# Altium PCB MULTITESTCARD V1I1.PcbDoc (part 1 of 2)
Units mm, origin at the board's own origin, x right, y up, seen from the top; angles counter-clockwise.
Board outline 57.4 x 56.52 mm, 4 copper layers (L1, L2 (GND), L3, L4), stack 0.778 mm thick; 59 components, 82 nets, 287 pads, 101 vias.
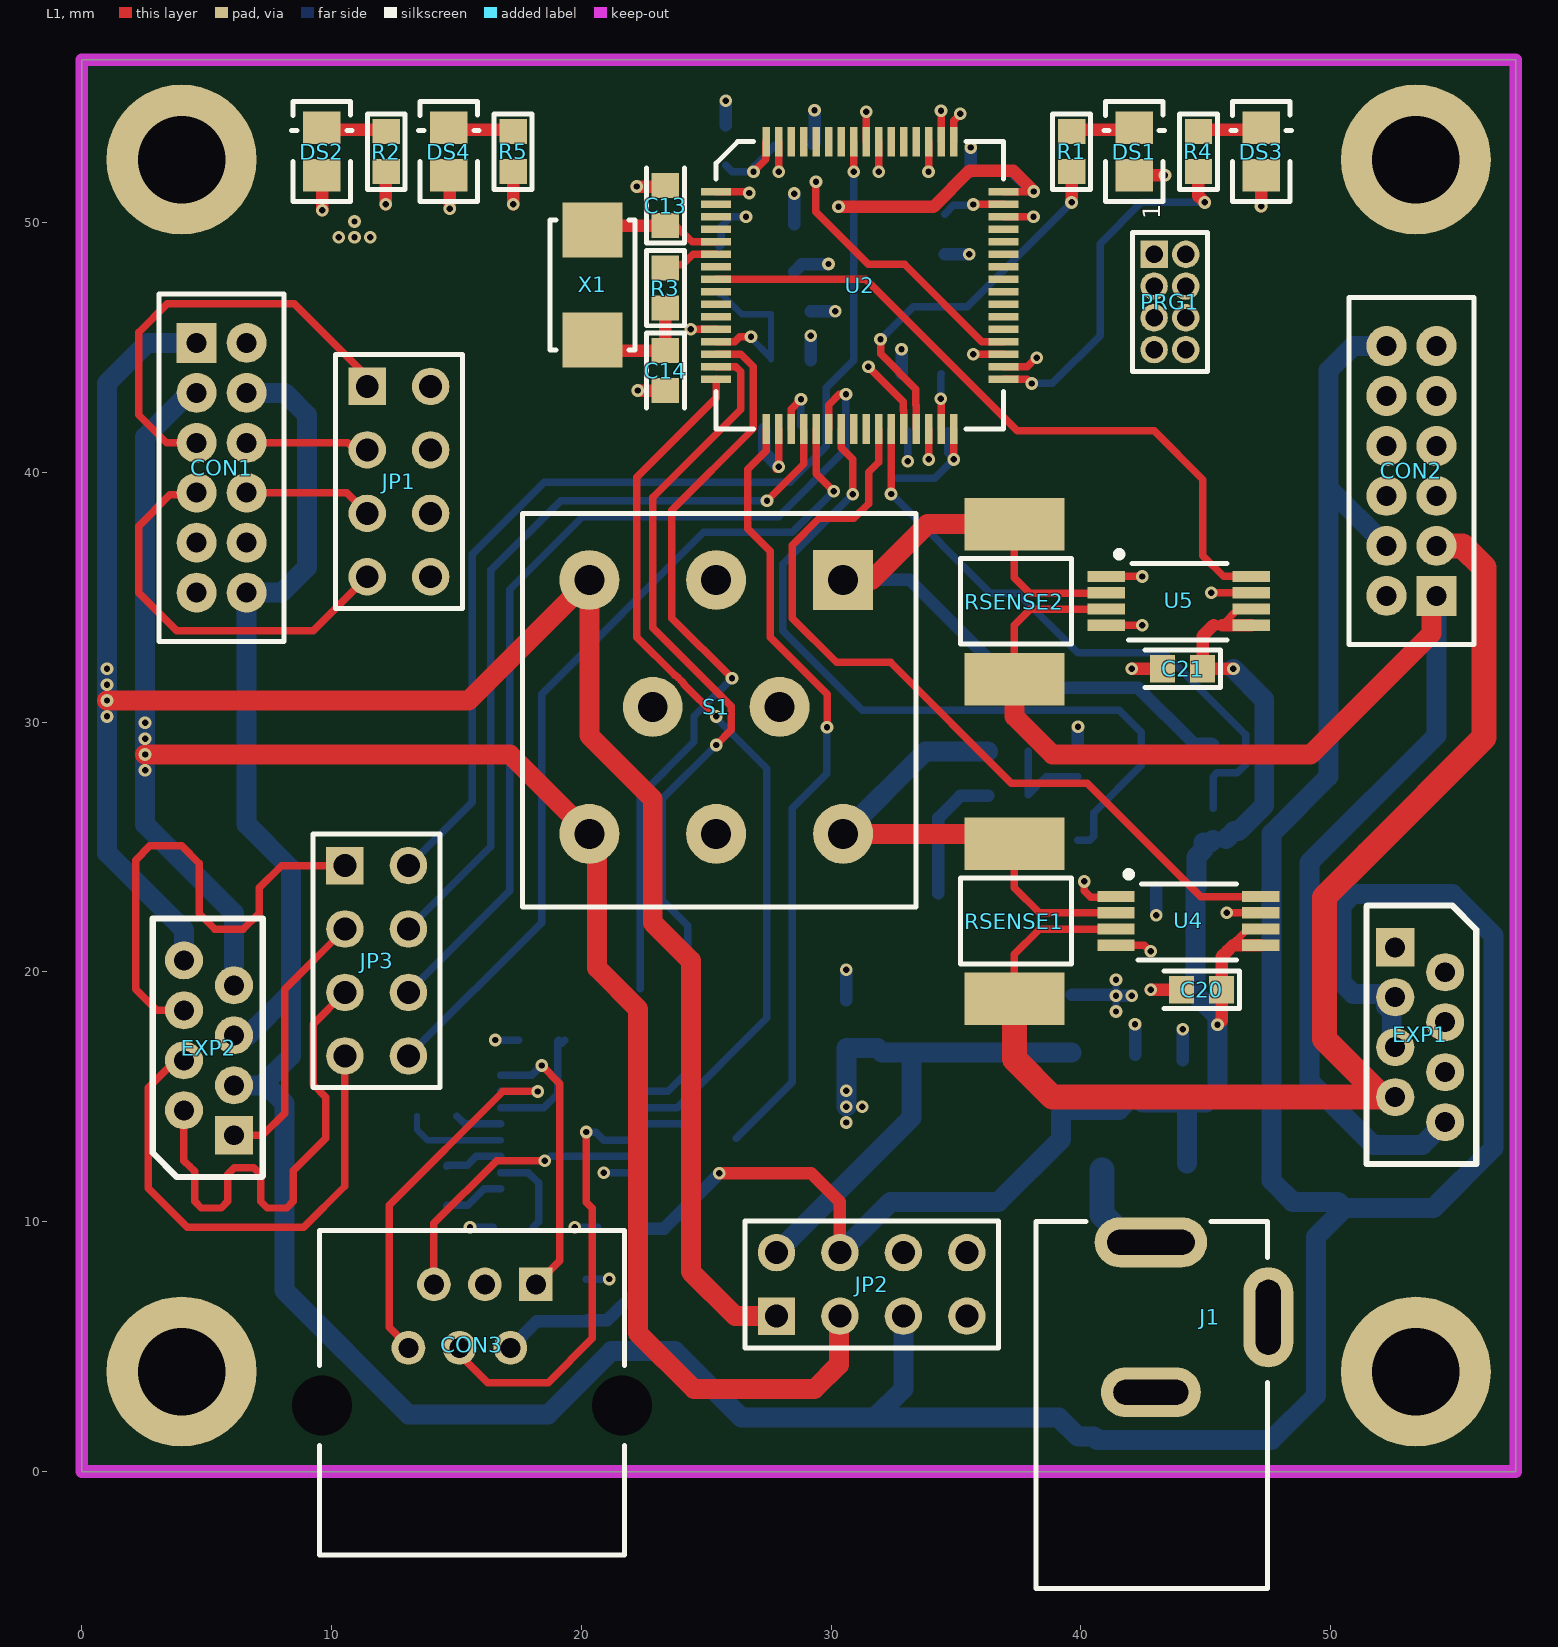
[diagram p0: L1 view]
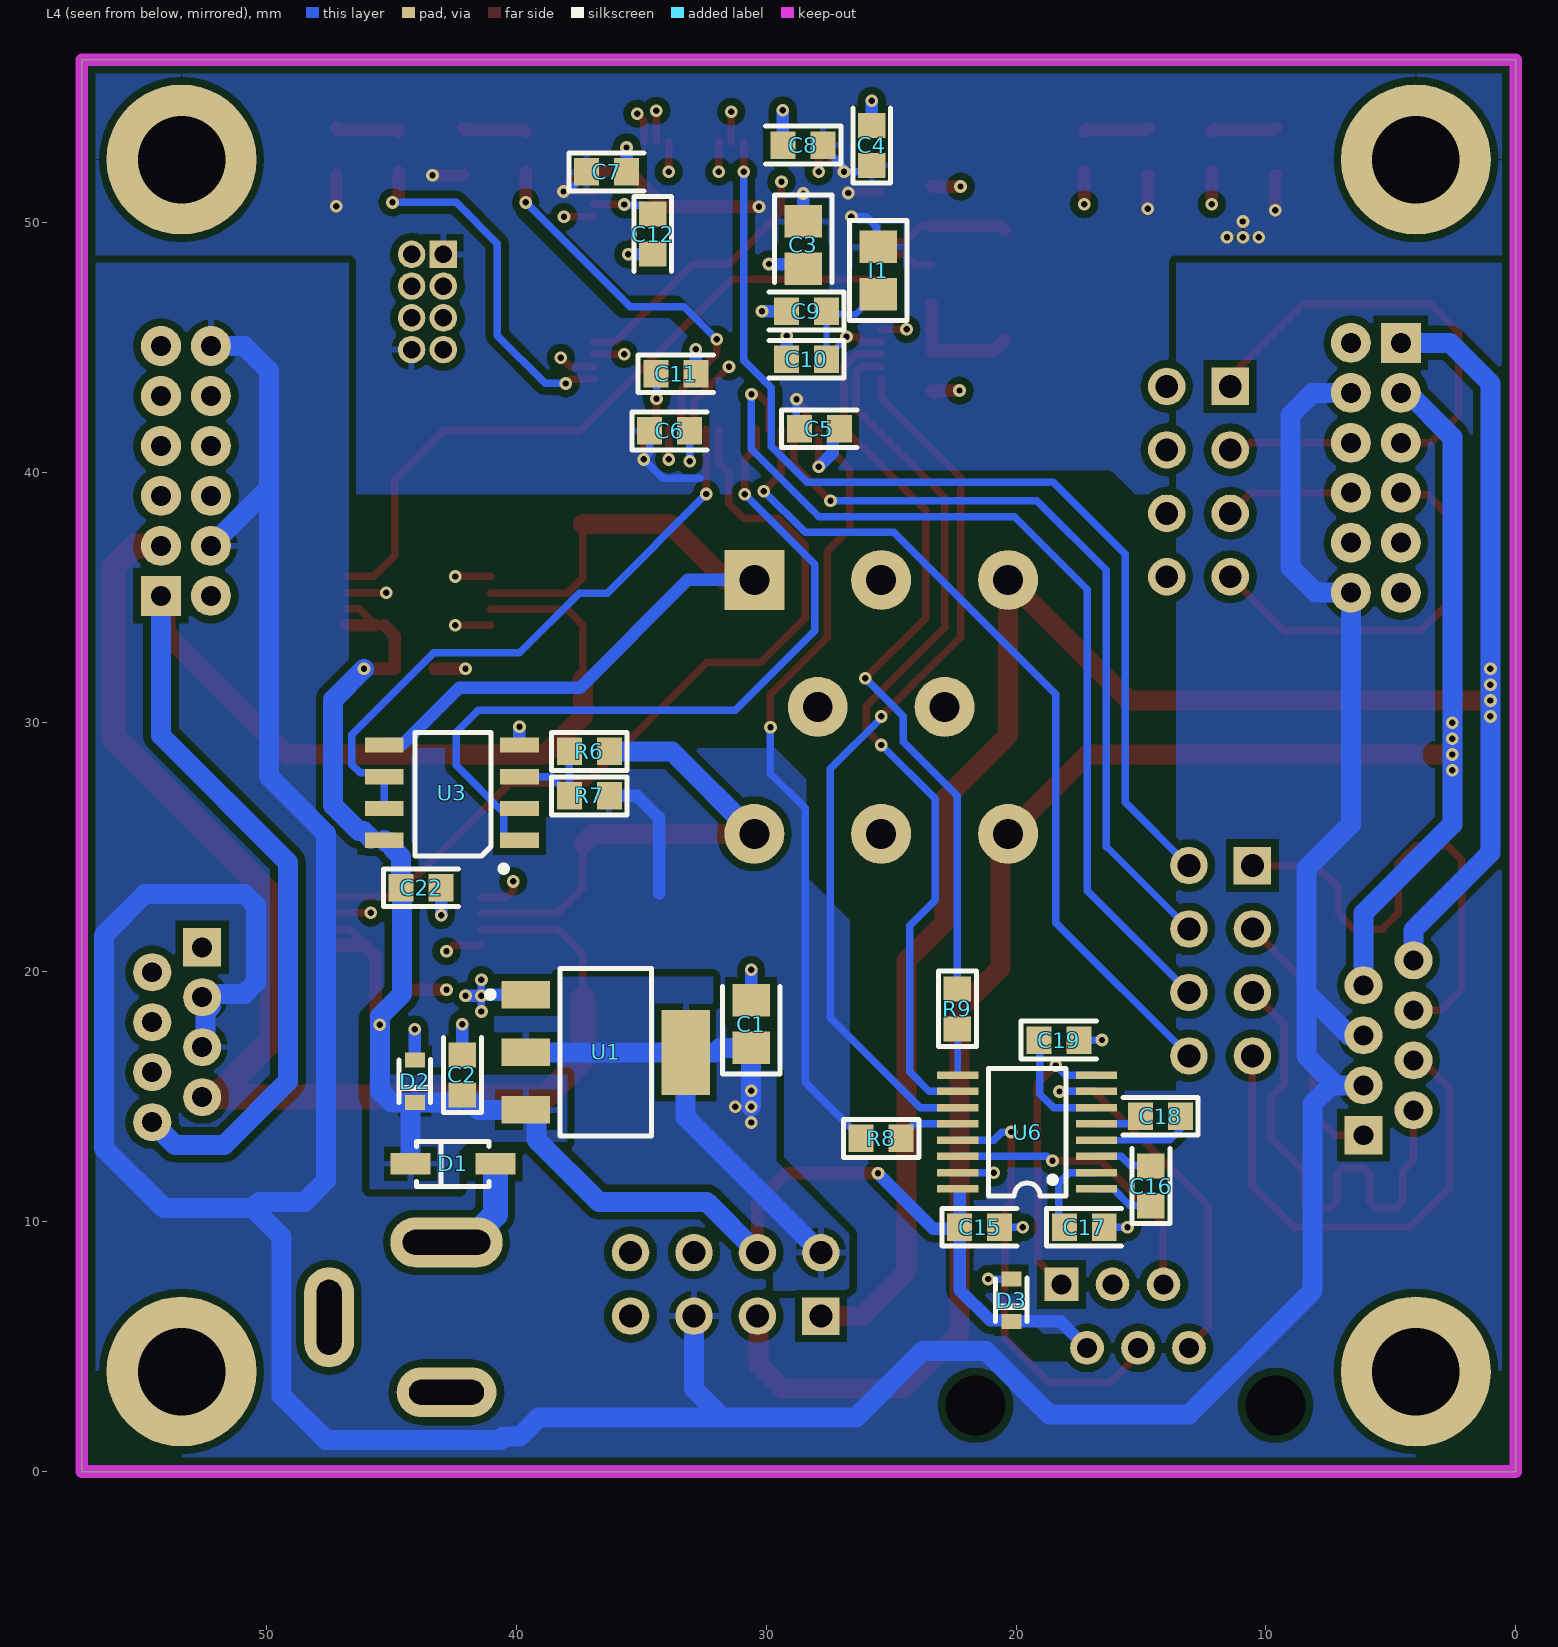
[diagram p1: L4 view, seen from below]
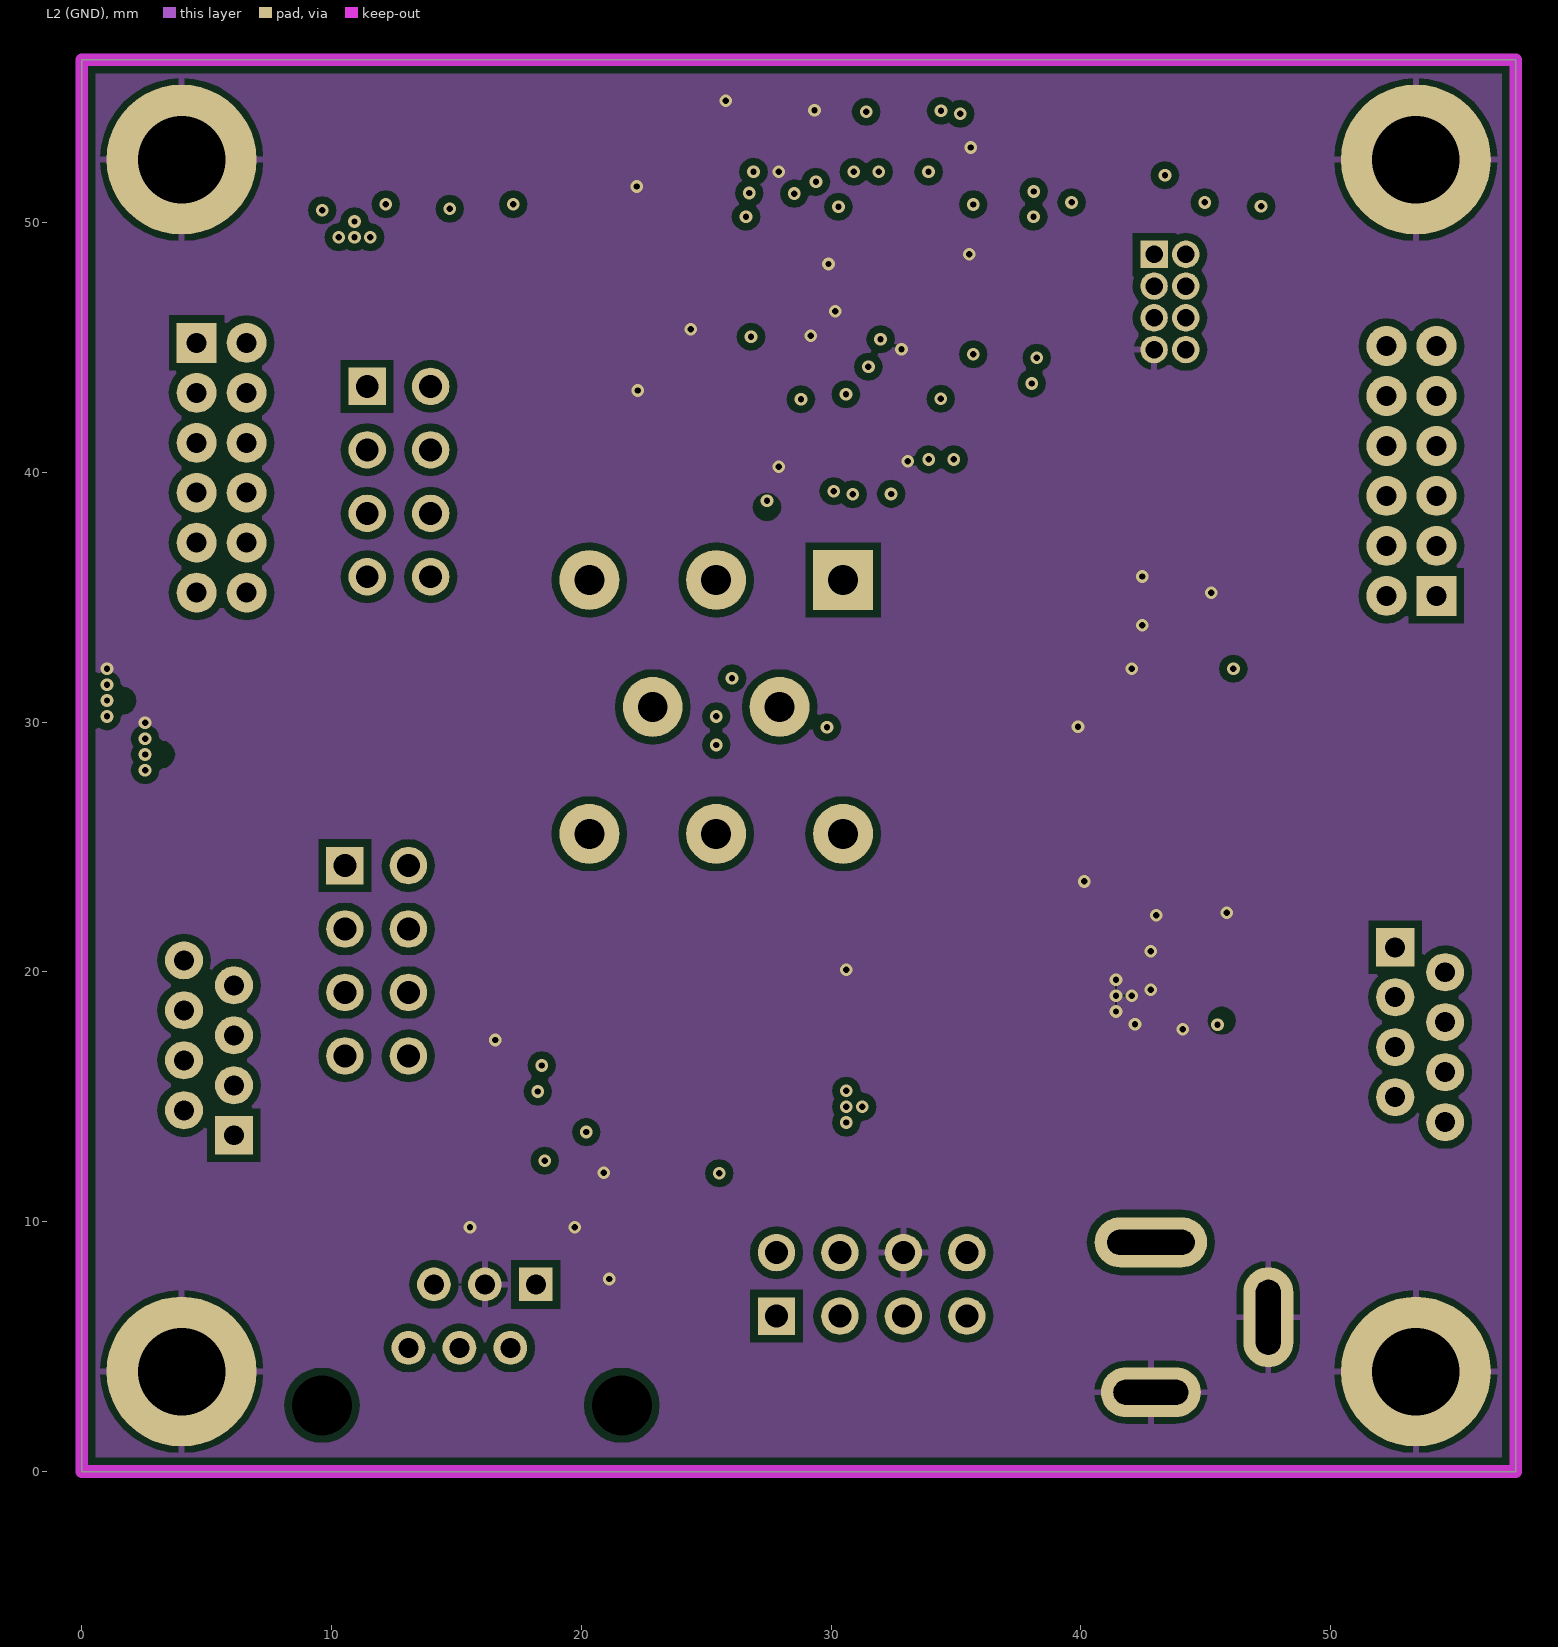
[diagram p2: L2 (GND)]
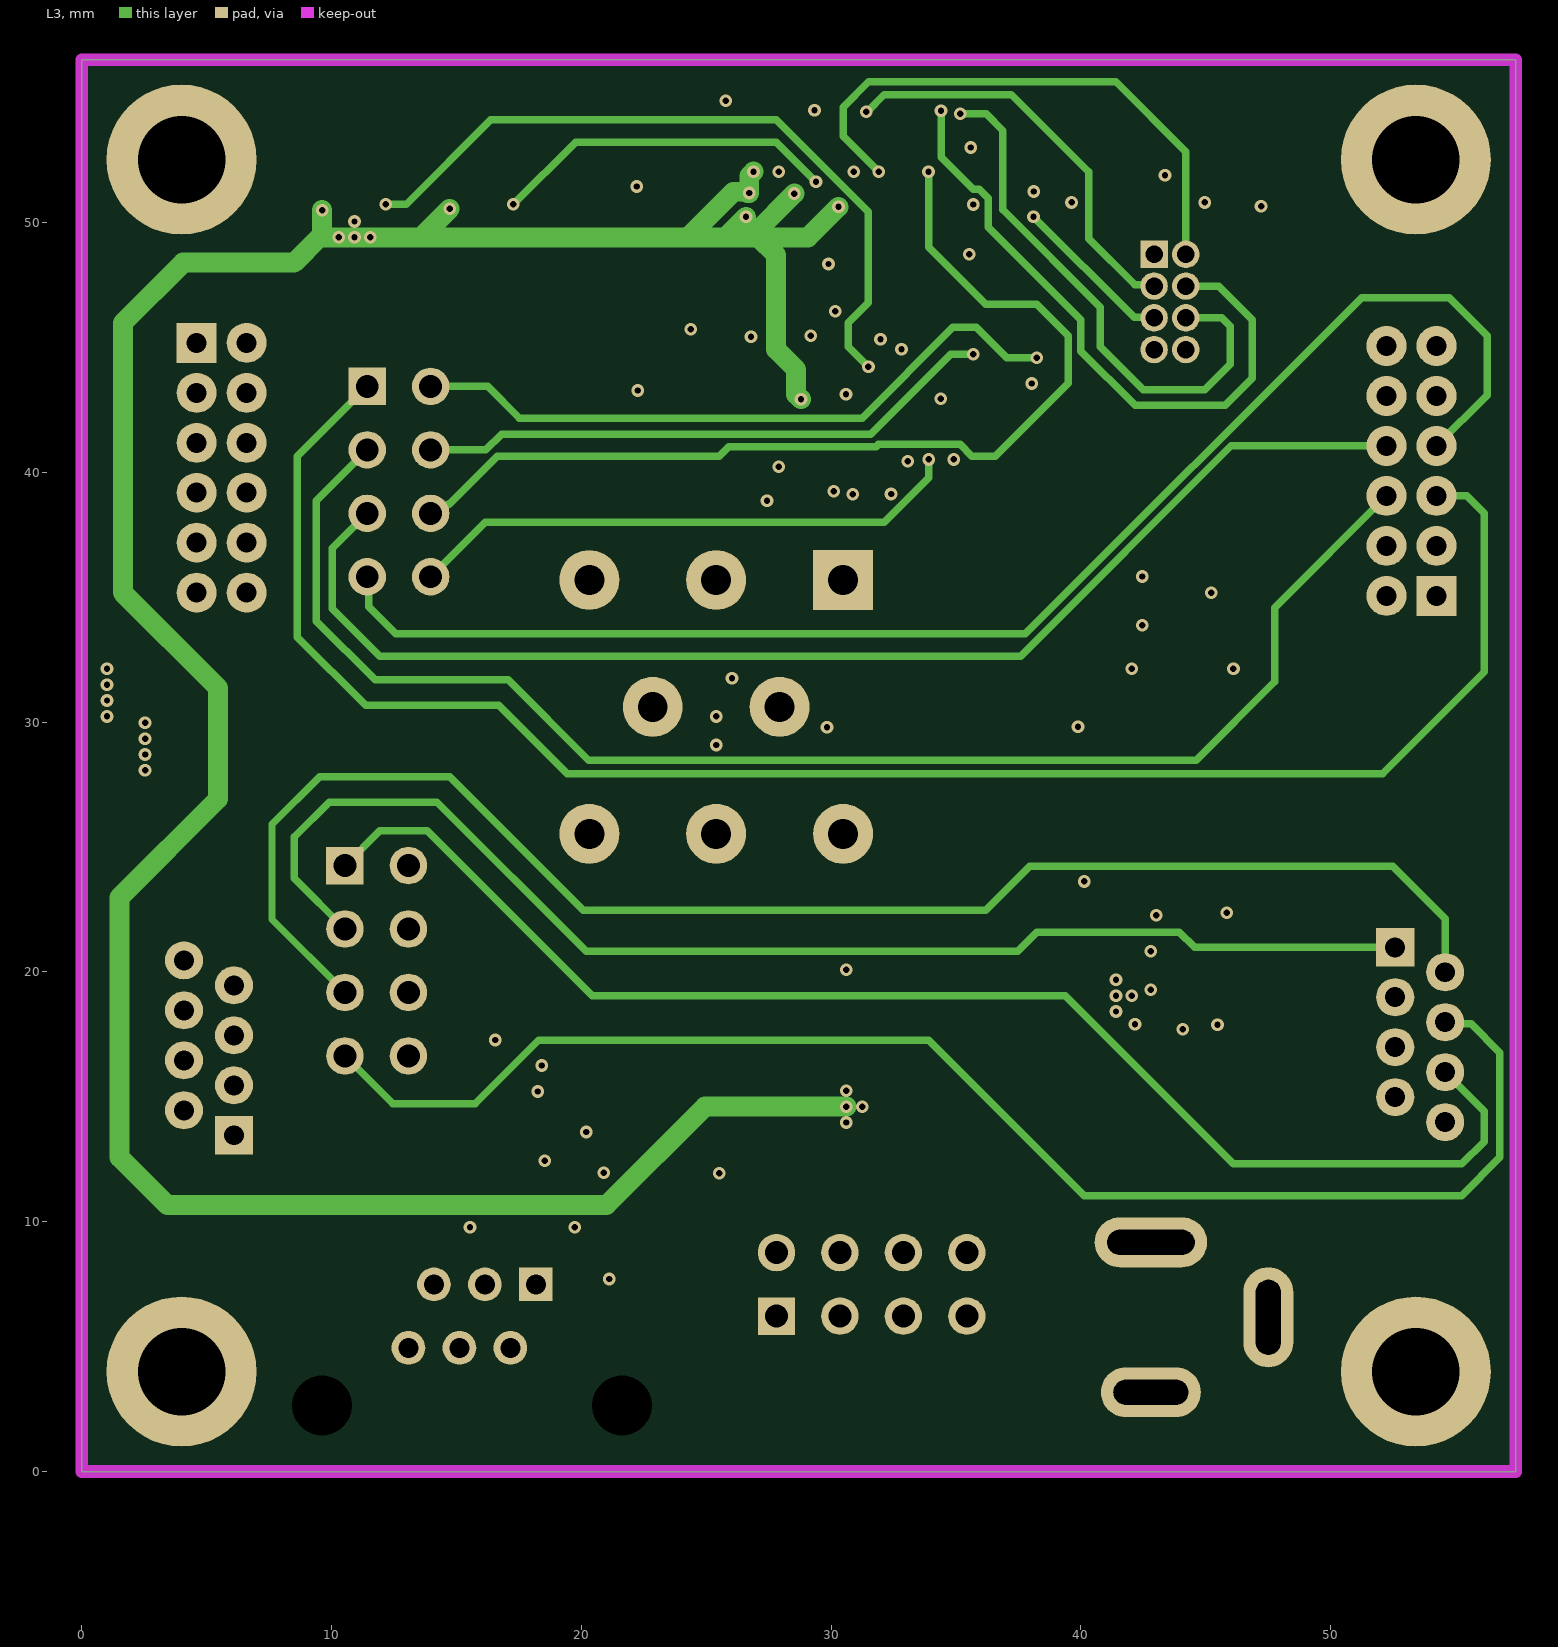
[diagram p3: L3]

## Layer stack, top to bottom
Top Solder: solder mask 0.0102, Solder Resist, Dk 3.5
L1: signal copper 0.0356
Dielectric1: core 0.254, FR-4, Dk 4.2
L2 (GND): signal copper 0.036
Dielectric 3: prepreg 0.127, Dk 4.2
L3: signal copper 0.036
Dielectric 2: core 0.254, Dk 4.2
L4: signal copper 0.0356
Bottom Solder: solder mask 0.0102, Solder Resist, Dk 3.5

## Board outline
0,0 57.404,0 57.404,56.515 0,56.515

## Design rules (kind name [scope] priority, off if disabled: settings)
Clearance Clearance_Polygons [InPolygon] p1: gap=0.3 ignorepadtopadclearanceinfootprint=FALSE
Clearance Clearance_MCU [HasFootprint('64-LQFP') or HasFootprint('8-TSSOP') vs OnLayer('Top Layer')] p2: gap=0.2 ignorepadtopadclearanceinfootprint=FALSE
Clearance Clearance_PRG1 [InComponent('PRG1')] p3: gap=0.17 ignorepadtopadclearanceinfootprint=FALSE
Clearance [All] p4: gap=0.2 ignorepadtopadclearanceinfootprint=FALSE
HoleSize HoleSize_MH [IsDesignator=('MH')] p1: absolutevalues=TRUE maxlimit=4 minlimit=0.025 maxpercent=80.000 minpercent=20.000
HoleSize [All] p2: absolutevalues=TRUE maxlimit=4 minlimit=0.025 maxpercent=80.000 minpercent=20.000
MatchedLengths MatchedLengths_SPI_TEST [All] p1: tolerance=0.254 checknetsindiffpair=FALSE checkdiffpairvsdiffpair=TRUE checkxsignals=TRUE checkothers=TRUE
MinimumSolderMaskSliver [All] p1: minsoldermaskwidth=0.05
PolygonConnect [All] p1: thpad.connectstyle=Relief thpad.reliefconductorwidth=0.254 thpad.reliefentries=4 thpad.polygonreliefangle="90 Angle" thpad.airgapwidth=0.254 smdpad.connectstyle=Relief smdpad.reliefconductorwidth=0.254 smdpad.reliefentries=4 smdpad.polygonreliefangle="90 Angle" smdpad.airgapwidth=0.254 via.connectstyle=Relief via.reliefconductorwidth=0.254 via.reliefentries=4 via.polygonreliefangle="90 Angle" via.airgapwidth=0
RoutingVias [All] p1: holewidth=0.254 width=0.508 viastyle="Through Hole" minholewidth=0.1 minwidth=0.4 maxholewidth=4 maxwidth=1.27
SilkToSolderMaskClearance SilkscreenOverComponentPads [IsPad] p1: minsilkscreentomaskgap=0.1 clearancetoexposedcopper=TRUE
SolderMaskExpansion [All] p1: expansion=0.102 istentingtop=FALSE
Width Width_PWR_TEST [InNetClass('PWR_TEST')] p1: maxlimit=1 minlimit=0.254 preferedwidth=0.8 minimp=50.000000 maximp=50.000000 favimp=50.000000
Width Width_Main_PWR [InNet('VGND','+3V3','+5V0','+5V')] p2: maxlimit=1 minlimit=0.254 preferedwidth=0.8 minimp=50.000000 maximp=50.000000 favimp=50.000000
Width [All] p3: maxlimit=0.5 minlimit=0.254 preferedwidth=0.3 minimp=50.000000 maximp=50.000000 favimp=50.000000
27 further rules are at their usual default settings.

## Classes and differential pairs
net class USART2_CON: CTS_MCU_RTS_PC_RS232 RTS_MCU_CTS_PC_RS232 RX_MCU_TX_PC_RS232 TX_MCU_RX_PC_RS232
net class USB: USB_DM USB_DP USB_ID USB_VBUS
net class USART3: USART3_CTS USART3_RTS USART3_RX USART3_TX
net class USART2: USART2_CTS USART2_RTS USART2_RX USART2_TX
net class UART_TEST: CTS_PORT RTS_PORT RX_PORT TX_PORT
net class SPI_TEST: SPI_CS SPI_MISO SPI_MOSI SPI_SCK
net class SPI1: SPI1_MISO SPI1_MOSI SPI1_NNS SPI1_SCK
net class LCD: LCD_D0 LCD_D1 LCD_D2 LCD_D3 LCD_D4 LCD_D5 LCD_D6 LCD_D7 LCD_E LCD_RS LCD_RW
net class JTAG: JTCK/SWCLK JTDI JTDO/TRACESWO JTMS/SWDIO NJTRST
net class PWR_TEST: +3V3IN +3V3OUT +3V3TEST +5VIN +5VOUT +5VTEST
component class Designator: C15 C16 C17 C18 C19 CON3 D3 D? R8 R9 U6 USB?
component class Designator: C20 C21 C22 CON1 CON2 CON? EXP1 EXP2 EXP? JP1 JP2 JP3 JP? R6 R7 R19 R? RSENSE1 RSENSE2 RSENSE? S1 S? U3 U4 U5 U?
component class Designator: * C1 C2 C3 C4 C5 C6 C7 C8 C9 C10 C11 C12 C13 C14 C? D1 D2 DS1 DS2 DS3 DS4 DS? I1 I? J1 PRG1 PRG? R1 R2 R3 R4 R5 U1 U2 X1 X?

## Components (designator, comment, footprint, x,y, rotation, side; value= is the part's Value field where it differs from the comment)
C1 "10uF" CC2012-0805 30.607,17.907 r90 bottom
C2 "0.1uF" CC-0603 42.164,15.875 r90 bottom
C3 "10uF" CC2012-0805 28.524,49.098 r270 bottom
C4 "0.1uF" CC-0603 25.781,53.086 r90 bottom
C5 "0.1uF" CC-0603 27.876,41.741 r180 bottom
C6 "0.1uF" CC-0603 33.871,41.656 r180 bottom
C7 "0.1uF" CC-0603 36.392,52.021 r180 bottom
C8 "0.1uF" CC-0603 28.526,53.095 r0 bottom
C9 "0.1uF" CC-0603 28.392,46.448 r0 bottom
C10 "1uF" CC-0603 28.392,44.524 r0 bottom
C11 "2.2uF" CC-0603 33.617,43.942 r180 bottom
C12 "2.2uF" CC-0603 34.544,49.53 r270 bottom
C13 "20pF" CC-0603 23.368,50.673 r90 top
C14 "20pF" CC-0603 23.368,44.069 r270 top
C15 "0.1uF" CC-0603 21.463,9.779 r180 bottom
C16 "0.1uF" CC-0603 14.605,11.43 r90 bottom
C17 "0.47uF" CC-0603 17.272,9.779 r180 bottom
C18 "0.47uF" CC-0603 14.224,14.224 r0 bottom
C19 "0.47uF" CC-0603 18.288,17.272 r180 bottom
C20 "0.1uF" CC-0603 44.831,19.285 r180 top
C21 "0.1uF" CC-0603 44.069,32.131 r180 top
C22 "0.1uF" CC-0603 43.815,23.368 r180 bottom
CON1 "CON PRINTER" "HEADER 2X6 B12B PHDS" 4.604,45.179 r0 top
CON2 "CON PRINTER" "HEADER 2X6 B12B PHDS" 54.229,35.052 r180 top
CON3 "RJ11" JACK1.02-2H6C 15.621,-3.347 r0 top locked
D1 "1N4148W-TP" SOD123 42.545,12.319 r0 bottom
D2 "Diode" SOD-523 44.069,15.621 r270 bottom
D3 "Diode" SOD-523 20.193,6.858 r270 bottom
DS1 "LED GREEN" LED-SMD-0805 42.164,52.832 r270 top
DS2 "LED GREEN" LED-SMD-0805 9.652,52.832 r270 top
DS3 "LED GREEN" LED-SMD-0805 47.244,52.832 r270 top
DS4 "LED GREEN" LED-SMD-0805 14.732,52.832 r270 top
EXP1 "SPI EXPANSION PORT" "CONN FPC/FFC 8POS" 53.403,17.961 r90 top
EXP2 "SPI EXPANSION PORT" "CONN FPC/FFC 8POS" 5.271,16.487 r270 top
I1 "120Ohm@100MHz 200mA" L-0805 25.502,48.067 r270 bottom
J1 "PWR2.5_AC" KLD-0202-AC 47.474,-4.675 r90 top
JP1 "JUMPER" HDR4X2 11.43,43.434 r0 top
JP2 "JUMPER" HDR4X2 27.813,6.223 r90 top
JP3 "JUMPER" HDR4X2 10.541,24.257 r0 top locked
PRG1 "JTAG" 20021311-00008T4LF 43.561,46.815 r90 top
R1 "1K" R-0603 39.624,52.832 r270 top
R2 "1K" R-0603 12.192,52.832 r270 top
R3 "390 Ohm" R-0603 23.368,47.371 r90 top
R4 "1K" R-0603 44.704,52.832 r270 top
R5 "1K" R-0603 17.272,52.832 r270 top
R6 "1K" R-0603 37.084,28.824 r0 bottom
R7 "1.2K" R-0603 37.084,27.046 r0 bottom
R8 "1K" R-0603 25.4,13.335 r180 bottom
R9 "1K" R-0603 22.352,18.52 r270 bottom
RSENSE1 "15 mOhm Shunt R" R-2512 37.338,18.923 r90 top
RSENSE2 "15 mOhm Shunt R" R-2512 37.338,31.72 r90 top
S1 "SWITCH PUSHBUTTON" UB26SKW03N 20.32,25.527 r90 top locked
U1 "LM1117" SOT223 39.643,19.07 r270 bottom
U2 "STM32F205RCT6" 64-LQFP 25.4,51.228 r270 top locked
U3 "LM2904DR" 8-SOIC 39.878,25.273 r0 bottom
U4 "IC AMP CURRENT" 8-TSSOP 41.402,23.017 r0 top
U5 "IC AMP CURRENT" 8-TSSOP 41.021,35.829 r0 top
U6 "ST3232EBTR" TSSOP-16 19.558,13.589 r90 bottom locked
X1 "25MHz" "ABM3 CRYSTAL" 20.447,47.498 r90 top

## Footprints (in the part's own frame and the unit in brackets; to place one, negate y for a bottom-side part, rotate by r counter-clockwise, add the part's x,y. Pads: shape width x height; smd on the part's side, far side on the other; paste and mask are expansions set on the pad)
8-SOIC [mil] "LM2904DR"
  rect 61x24 smd mask+1.97: 1(0,0) 2(0,-50) 3(0,-100) 4(0,-150) 5(213,-150) 6(213,-100) 7(213,-50) 8(213,0)
  silkscreen extent 20,-170 165,50, body extent -17,-174 227,24, height 66
8-TSSOP [mm] "INA240A1PWR"
  rect 1.5x0.45 smd mask+0.05: 1(0,0) 2(0,-0.65) 3(0,-1.3) 4(0,-1.95) 5(5.8,-1.95) 6(5.8,-1.3) 7(5.8,-0.65) 8(5.8,0)
  silkscreen extent 0.38,-2.54 4.83,1.01, body extent -0.57,-2.51 6.22,0.89, height 1.12
64-LQFP [mm] "64-LQFP"
  rect 0.3x1.2 smd mask+0.05: 1(0,0) 2(0.5,0) 3(1,0) 4(1.5,0) 5(2,0) 6(2.5,0) 7(3,0) 8(3.5,0) 9(4,0) 10(4.5,0) 11(5,0) 12(5.5,0) 13(6,0) 14(6.5,0) 15(7,0) 16(7.5,0) 33(7.5,11.5) 34(7,11.5) 35(6.5,11.5) 36(6,11.5) 37(5.5,11.5) 38(5,11.5) 39(4.5,11.5) 40(4,11.5) 41(3.5,11.5) 42(3,11.5) 43(2.5,11.5) 44(2,11.5) 45(1.5,11.5) 46(1,11.5) 47(0.5,11.5) 48(0,11.5)
  rect 1.2x0.3 smd mask+0.05: 17(9.5,2) 18(9.5,2.5) 19(9.5,3) 20(9.5,3.5) 21(9.5,4) 22(9.5,4.5) 23(9.5,5) 24(9.5,5.5) 25(9.5,6) 26(9.5,6.5) 27(9.5,7) 28(9.5,7.5) 29(9.5,8) 30(9.5,8.5) 31(9.5,9) 32(9.5,9.5) 49(-2,9.5) 50(-2,9) 51(-2,8.5) 52(-2,8) 53(-2,7.5) 54(-2,7) 55(-2,6.5) 56(-2,6) 57(-2,5.5) 58(-2,5) 59(-2,4.5) 60(-2,4) 61(-2,3.5) 62(-2,3) 63(-2,2.5) 64(-2,2)
  silkscreen extent -2.01,0 9.5,11.5, body extent -2.29,-0.28 9.71,11.71, height 1.55
20021311-00008T4LF [mm] "CONN RECEPT 8POS DUAL VERT T/H"
  rect 1.1x1.1 hole 0.7: 1(1.905,0.635)
  round 1.1 hole 0.7: 2(1.905,-0.635) 3(0.635,0.635) 4(0.635,-0.635) 5(-0.635,0.635) 6(-0.635,-0.635) 7(-1.905,0.635) 8(-1.905,-0.635)
  silkscreen extent -2.78,-1.5 2.78,1.5, body extent -2.77,-1.5 2.77,1.5, height 4.3
"ABM3 CRYSTAL" [mm] "CRYSTAL 25MHZ 18PF SMD (535-10645-1-ND)"
  rect 2.2x2.4 smd: 1(-2.2,0) 2(2.2,0)
  silkscreen extent -2.6,-1.7 2.6,1.7, body extent -2.52,-1.63 2.47,1.57, height 1.1
CC2012-0805 [mm]
  rect 1.3x1.5 smd: 1(-0.95,0) 2(0.95,0)
  silkscreen extent -2,-1.15 1.5,1.15, body extent -1.6,-0.82 1.6,0.78, height 1.6
CC-0603 [mm] "CAP CER NPO 0603"
  rect 1x1.1 smd: 1(-0.8,0) 2(0.8,0)
  silkscreen extent -1.51,-0.76 1.5,0.75, body extent -0.8,-0.4 0.8,0.4, height 0.78
"CONN FPC/FFC 8POS" [mm] "CONN FPC/FFC 8POS 1MM VERT PCB"
  rect 1.524x1.524 hole 0.8: 1(3.025,0.825)
  round 1.524 hole 0.8: 2(2.025,-1.175) 3(1.025,0.825) 4(0.025,-1.175) 5(-0.975,0.825) 6(-1.975,-1.175) 7(-2.975,0.825) 8(-3.975,-1.175)
  silkscreen extent -5.65,-2.43 4.7,1.97, body extent -5.75,-2.1 4.85,1.8, height 5.95
HDR4X2 [mm] "Connector; Header; 8 Position"
  rect 1.5x1.5 hole 0.914: 1(0,0)
  round 1.5 hole 0.914: 2(2.54,0) 3(0,-2.54) 4(2.54,-2.54) 5(0,-5.08) 6(2.54,-5.08) 7(0,-7.62) 8(2.54,-7.62)
  silkscreen extent -1.27,-8.89 3.81,1.27, body extent -1.26,-8.86 3.82,1.24, height 8.38
"HEADER 2X6 B12B PHDS" [mm]
  rect 1.6x1.6 hole 0.8: 1(0,0)
  round 1.6 hole 0.8: 2(2,0) 3(0,-2) 4(2,-2) 5(0,-4) 6(2,-4) 7(0,-6) 8(2,-6) 9(0,-8) 10(2,-8) 11(0,-10) 12(2,-10)
  silkscreen extent -1.5,-11.95 3.5,1.95, body extent -1.44,-11.95 3.56,2.05, height 6.86
JACK1.02-2H6C [mm] "Connector; PCB Jack, Thru-Hole; 1-Port, 6 Positions, 6 Loaded; Unshielded without Lightpipes; Right Angle"
  rect 1.35x1.35 hole 0.8: 1(2.56,10.84)
  round 1.35 hole 0.8: 2(1.54,8.3) 3(0.52,10.84) 4(-0.5,8.3) 5(-1.52,10.84) 6(-2.54,8.3)
  round 2.1 hole 2.4 unplated: MH1(-6,6) MH2(6,6)
  silkscreen extent -6.1,0 6.1,13, body extent -7.15,0 7.15,13.3, height 14.5
KLD-0202-AC [mm] "DC Power Jack, 2.5mm, KLD Series, PCB Mount"
  oval 2x4.5 hole 1 slot 3.5 at 90 deg: 1(13.85,4.675)
  oval 2x4 hole 1 slot 3 at 90 deg: 2(7.85,4.675)
  oval 4x2 hole 1 slot 3 at 0 deg: 3(10.85,-0.025)
  silkscreen extent 0,0 14.67,9.28, body extent 0.14,-0.25 14.54,9.15, height 11.02
L-0805 [mm] "0.079\" L x 0.049\" W (2.00mm x 1.25mm)"
  rect 1.3x1.5 smd: 1(-0.95,-0.025) 2(0.95,-0.025)
  silkscreen extent -2,-1.18 2,1.12, body extent -1,-0.64 1,0.66, height 1.22
LED-SMD-0805 [mm] "LED CHIPLED 570NM GREEN 0805 SMD"
  rect 1.3x1.5 smd: 1(-0.95,-0.035) 2(0.95,-0.035)
  silkscreen extent -2,-1.24 2,1.17, body extent -1.03,-0.48 1.03,0.42, height 0.85
R-0603 [mm] "RES 0603"
  rect 1x1.1 smd: 1(-0.8,0) 2(0.8,0)
  silkscreen extent -1.51,-0.76 1.51,0.76, body extent -0.8,-0.43 0.8,0.39, height 0.44
R-2512 [mm] "RES 2512"
  rect 2.1x4 smd: 1(0,0) 2(6.2,0)
  silkscreen extent 1.4,-2.29 4.83,2.16, body extent -0.15,-1.76 6.5,1.77, height 0.91
SOD123 [mm] "SOD-123; 2 Leads; Body 2.7 x 1.6 mm, (LxW) Silk con marca en catodo"
  rect 1.6x0.85 smd: 1(-1.7,0) 2(1.7,0)
  silkscreen extent -1.45,-0.9 1.45,0.9, body extent -1.88,-0.81 1.82,0.79, height 1.15
SOD-523 [mm] "DIODE SC-79 SOD-523"
  rect 0.6x0.8 smd: 1(-0.85,0) 2(0.85,0)
  silkscreen extent -0.88,-0.62 0.85,0.62, body extent -0.81,-0.4 0.79,0.4, height 0.7
SOT223 [mm] "Connector LM1117"
  rect 1.1x1.95 smd: 1(-0.008,0.019) 2(2.292,0.019) 3(4.592,0.019)
  rect 3.4x1.95 smd: 4(2.292,6.419)
  silkscreen extent -1.06,-1.53 5.64,5.04, body extent -0.95,-0.2 5.55,6.8, height 1.67
TSSOP-16 [mm] "Shrink Small Outline, Plastic, Thin; 16 Leads; Body Width 4.5 mm; Pitch 0.65 mm"
  rect 0.3x1.65 smd: 1(-2.275,-2.775) 2(-1.625,-2.775) 3(-0.975,-2.775) 4(-0.325,-2.775) 5(0.325,-2.775) 6(0.975,-2.775) 7(1.625,-2.775) 8(2.275,-2.775) 9(2.275,2.775) 10(1.625,2.775) 11(0.975,2.775) 12(0.325,2.775) 13(-0.325,2.775) 14(-0.975,2.775) 15(-1.625,2.775) 16(-2.275,2.775)
  silkscreen extent -2.55,-1.55 2.55,1.55, body extent -2.5,-3.18 2.5,3.22, height 1
UB26SKW03N [mm] "UB26SKW03N"
  rect 2.4x2.4 hole 1.2: 1(10.16,-10.16)
  round 2.4 hole 1.2: 2(10.16,-5.08) 3(10.16,0) 4(0,-10.16) 5(0,-5.08) 6(0,0) L+(5.08,-2.54) L-(5.08,-7.62)
  silkscreen extent -2.92,-13.08 12.83,2.67, body extent -2.67,-12.83 12.57,2.41, height 12.5

## Part data
C1 C3: library part TCP0J106M8R, "CAP TANT 10UF 6.3V 20% 0805", Case Code (Imperial)=0805, Case Code (Metric)=2012, ESR (Equivalent Series Resistance)=8.3R, Manufacturer=Rohm, Max Operating Temperature=125°C, Min Operating Temperature=-55°C, Package Quantity=1, Supplier Part Number 1=511-1447-6-ND, Tolerance=20%, Voltage Rating=6.3V, Capacitance=10uF, Case/Package=0805, ComponentLink1Description=http://rohmfs.rohm.com/en/products/databook/datasheet/passive/tantalum_capacitor/tantalum_chip_capacitor/tc_p.pdf?src-supplier=Future+Electronics, ComponentLink1URL=http://rohmfs.rohm.com/en/products/databook/datasheet/passive/tantalum_capacitor/tantalum_chip_capacitor/tc_p.pdf?src-supplier=Future+Electronics, Features="General Purpose", Height - Seated (Max)=0.047inch, Lead Free="Lead Free", Length=0.079inch, Manufacturer Part Number=TCP0J106M8R, Mount="Surface Mount", Packaging="Tape and Reel", Pricing 1="1=0.46, 10=0.316, 100=0.1898, 500=0.1423, 1000=0.1202 (USD)", Stock 1=89891, Supplier 1=Digi-Key, Voltage Rating (DC)=6.3V, Width=0.049inch
C2 C4 C5 C6 C7 C8 C9 C15 C16 C20 C21 C22: library part CGA3E2X7R1H104K080AA, "CAP CER 0.1uF 50V X7R 0603", Capacitance=100nF, Case Code (Imperial)=0603, Case Code (Metric)=1608, Dielectric=X7R, Manufacturer=TDK, Max Operating Temperature=125°C, Min Operating Temperature=-55°C, Package Quantity=1, Ratings=AEC-Q200, Supplier Part Number 1=445-5666-6-ND, Tolerance=10%, Voltage=50V, Case/Package=0603, ComponentLink1Description=http://www.farnell.com/datasheets/1796654.pdf?src-supplier=Mouser, ComponentLink1URL=http://www.farnell.com/datasheets/1796654.pdf?src-supplier=Mouser, ComponentLink2Description=http://product.tdk.com/capacitor/mlcc/en/documents/mlccspec_automotive_general_midvoltage_en.pdf?src-supplier=Future+Electronics, ComponentLink2URL=http://product.tdk.com/capacitor/mlcc/en/documents/mlccspec_automotive_general_midvoltage_en.pdf?src-supplier=Future+Electronics, ComponentLink3Description=http://www.farnell.com/datasheets/1735392.pdf?src-supplier=Element14, ComponentLink3URL=http://www.farnell.com/datasheets/1735392.pdf?src-supplier=Element14, ComponentLink4Description=https://www.verical.com/server-webapp/html/getDatasheet?partID=715867&src-supplier=Verical, ComponentLink4URL=https://www.verical.com/server-webapp/html/getDatasheet?partID=715867&src-supplier=Verical, ComponentLink5Description=http://www.farnell.com/datasheets/1796654.pdf?src-supplier=Newark, ComponentLink5URL=http://www.farnell.com/datasheets/1796654.pdf?src-supplier=Newark, Composition=Ceramic, Depth=0.8mm, Height=0.8mm, Lead Free="Lead Free", Length=1.6mm, Manufacturer Part Number=CGA3E2X7R1H104K080AA, Mount="Surface Mount", Packaging="Tape and Reel", Pricing 1="1=0.1, 10=0.075, 100=0.0335, 500=0.0239, 1000=0.0188 (USD)", Radiation Hardening=No, REACH SVHC="No SVHC", Stock 1=11580568, Supplier 1=Digi-Key, Termination=SMD/SMT, Thickness=0.035inch, Voltage Rating=50V, Voltage Rating (DC)=50V, Weight=7.1E-05oz, Width=0.8mm
C10: library part C1608X5R1H105K080AB, "CAP CER 1uF 50V X5R 0603", Case Code (Imperial)=0603, Case Code (Metric)=1608, Dielectric=X5R, Dielectric Material=Ceramic, Manufacturer=TDK, Max Operating Temperature=85°C, Min Operating Temperature=-55°C, Package Quantity=1, Supplier Part Number 1=445-7468-6-ND, Tolerance=10%, Voltage=50V, Capacitance=1uF, Case/Package=0603, ComponentLink1Description=http://www.tdk.co.jp/tefe02/e412_c.pdf?src-supplier=Avnet+Europe, ComponentLink1URL=http://www.tdk.co.jp/tefe02/e412_c.pdf?src-supplier=Avnet+Europe, ComponentLink2Description=https://product.tdk.com/info/en/catalog/spec/mlccspec_commercial_general_midvoltage_en.pdf?src-supplier=Digi-Key, ComponentLink2URL=https://product.tdk.com/info/en/catalog/spec/mlccspec_commercial_general_midvoltage_en.pdf?src-supplier=Digi-Key, ComponentLink3Description=http://www.farnell.com/datasheets/1913358.pdf?src-supplier=Element14, ComponentLink3URL=http://www.farnell.com/datasheets/1913358.pdf?src-supplier=Element14, Composition=Ceramic, Depth=0.8mm, Height=0.8mm, Lead Free="Lead Free", Length=1.6mm, Manufacturer Part Number=C1608X5R1H105K080AB, Mount="Surface Mount", Number of Pins=2, Packaging="Tape and Reel", Pricing 1="1=0.25, 10=0.171, 100=0.0865, 500=0.0592, 1000=0.0524 (USD)", Radiation Hardening=No, REACH SVHC="No SVHC", Stock 1=233012, Supplier 1=Digi-Key, Termination=SMD/SMT, Thickness=0.035inch, Voltage Rating=50V, Voltage Rating (DC)=50V, Weight=7.1E-05oz, Width=0.031inch
C11 C12: library part C0603C225K4PACTU, "KEMET - C0603C225K4PACTU - CAP, MLCC, X5R, 2.2UF, 16V, 0603", Case Code (Imperial)=0603, Case Code (Metric)=1608, Dielectric=X5R, Dielectric Material=Ceramic, Manufacturer=KEMET, Max Operating Temperature=85°C, Min Operating Temperature=-55°C, Package Quantity=1, Supplier Part Number 1=399-7886-1-ND, Tolerance=10%, Voltage=16V, Capacitance=2.2uF, Case/Package=0603, ComponentLink1Description=http://www.farnell.com/datasheets/2739684.pdf?src-supplier=Farnell, ComponentLink1URL=http://www.farnell.com/datasheets/2739684.pdf?src-supplier=Farnell, ComponentLink2Description=http://www.farnell.com/datasheets/2123797.pdf?src-supplier=Element14, ComponentLink2URL=http://www.farnell.com/datasheets/2123797.pdf?src-supplier=Element14, Contact Plating=Tin,Matte, Depth=0.8mm, Dissipation Factor=5%, Height=0.8mm, Lead Free="Lead Free", Length=1.6mm, Manufacturer Part Number=C0603C225K4PACTU, Mount="Surface Mount", Number of Pins=2, Packaging="Tape and Reel", Pricing 1="1=0.16, 10=0.112, 100=0.0528, 500=0.037, 1000=0.0307 (USD)", Radiation Hardening=No, REACH SVHC="No SVHC", Stock 1=49901, Supplier 1=Digi-Key, Termination=SMD/SMT, Thickness=0.034inch, Voltage Rating=16V, Voltage Rating (DC)=16V, Width=0.8mm
C13 C14: library part CC0603JRNPO9BN200, "CAP CER 20PF 50V C0G/NPO 0603", Case Code (Imperial)=0603, Case Code (Metric)=1608, Dielectric=C0G, Manufacturer=Yageo, Max Operating Temperature=125°C, Min Operating Temperature=-55°C, Package Quantity=4000, Supplier Part Number 1=311-1424-6-ND, Tolerance=5%, Voltage Rating=50V, Capacitance=20pF, Case/Package=0603, ComponentLink1Description=http://www.farnell.com/datasheets/1132289.pdf?src-supplier=Element14, ComponentLink1URL=http://www.farnell.com/datasheets/1132289.pdf?src-supplier=Element14, ComponentLink2Description=http://www.yageo.com/documents/recent/UPY-GP_NP0_16V-to-50V_16.pdf?src-supplier=Digi-Key, ComponentLink2URL=http://www.yageo.com/documents/recent/UPY-GP_NP0_16V-to-50V_16.pdf?src-supplier=Digi-Key, Composition=Ceramic, Depth=0.8mm, Lead Free="Lead Free", Length=1.6mm, Manufacturer Part Number=CC0603JRNPO9BN200, Mount="Surface Mount", Number of Pins=2, Packaging="Tape and Reel", Pricing 1="1=0.1, 10=0.048, 100=0.0214, 500=0.0153, 1000=0.012 (USD)", REACH SVHC=Unknown, Stock 1=223075, Supplier 1=Digi-Key, Termination=SMD/SMT, Thickness=0.035inch, Voltage Rating (DC)=50V, Weight=7.1E-05oz, Width=0.8mm
C17 C18 C19: library part CL10B474KO8NNNC, "Cap Ceramic 0.47uF 16V X7R 10% SMD 0603 125C T/R", Capacitance=470nF, Case Code (Imperial)=0603, Case Code (Metric)=1608, Dielectric=X7R, Manufacturer=Samsung, Max Operating Temperature=125°C, Min Operating Temperature=-55°C, Package Quantity=1, Supplier Part Number 1=1276-1062-6-ND, Tolerance=10%, Voltage=16V, Case/Package=0603, ComponentLink1Description=https://www.verical.com/server-webapp/html/getDatasheet?partID=354055&src-supplier=Verical, ComponentLink1URL=https://www.verical.com/server-webapp/html/getDatasheet?partID=354055&src-supplier=Verical, ComponentLink2Description=http://www1.futureelectronics.com/doc/SAMSUNG/CLSERIES.pdf?src-supplier=Future+Electronics, ComponentLink2URL=http://www1.futureelectronics.com/doc/SAMSUNG/CLSERIES.pdf?src-supplier=Future+Electronics, ComponentLink3Description=http://www.rapidonline.com/pdf/71-0319.pdf?src-supplier=Rapid+Electronics, ComponentLink3URL=http://www.rapidonline.com/pdf/71-0319.pdf?src-supplier=Rapid+Electronics, ComponentLink4Description=https://www.distrelec.biz/Web/Downloads/_e/ng/MLCC_CatalogDownload2013_ENG.pdf?mime=application%2Fpdf&src-supplier=Distrelec, ComponentLink4URL=https://www.distrelec.biz/Web/Downloads/_e/ng/MLCC_CatalogDownload2013_ENG.pdf?mime=application%2Fpdf&src-supplier=Distrelec, ComponentLink5Description=https://produktinfo.conrad.com/datenblaetter/450000-474999/456266-da-01-en-VS_KONDENSATOR_0603.pdf?src-supplier=Conrad, ComponentLink5URL=https://produktinfo.conrad.com/datenblaetter/450000-474999/456266-da-01-en-VS_KONDENSATOR_0603.pdf?src-supplier=Conrad, Contact Plating=Tin, Depth=0.8mm, Height=0.8mm, Lead Free="Lead Free", Length=1.6mm, Manufacturer Part Number=CL10B474KO8NNNC, Material=Ceramic, Mount="Surface Mount", Packaging="Tape and Reel", Pricing 1="1=0.1, 10=0.077, 100=0.0342, 500=0.0244, 1000=0.0192 (USD)", Radiation Hardening=No, Stock 1=123146, Supplier 1=Digi-Key, Thickness=0.035inch, Voltage Rating=16V, Voltage Rating (DC)=16V, Width=0.031inch
CON1 CON2: library part DF11-12DP-2DSA(24), "CONN HEADER VERT 12POS 2MM", Color=Black, Current Rating=2A, Flammability Rating="UL94 V-0", Insulation Resistance=1GR, Manufacturer=Hirose, Package Quantity=34, Supplier Part Number 1=H10233-ND, Voltage Rating=250V, ComponentLink1Description=http://uk.rs-online.com/webdocs/14ef/0900766b814efacf.pdf?src-supplier=RSComponents, ComponentLink1URL=http://uk.rs-online.com/webdocs/14ef/0900766b814efacf.pdf?src-supplier=RSComponents, ComponentLink2Description=https://www.distrelec.biz/Web/Downloads/_t/ds/DF11serie_eng_tds.pdf?mime=application%2Fpdf&src-supplier=Distrelec, ComponentLink2URL=https://www.distrelec.biz/Web/Downloads/_t/ds/DF11serie_eng_tds.pdf?mime=application%2Fpdf&src-supplier=Distrelec, Connector Type="Male Pin", Contact Gender=Male, Contact Material="Brass,Copper Alloy,Tin", Contact Mating Length=0.118inch, Contact Plating=Tin,Gold, Fastening Type=Detent, Gender=Male, Housing Color=Black, Housing Material=Polyamide, Lead Free="Lead Free", Manufacturer Part Number=DF11-12DP-2DSA(24), Mount="Through Hole", Number of Contacts=12, Number of Positions=12, Number of Rows=2, Orientation=Straight, Packaging=Rail/Tube, Pitch=2mm, Pricing 1="1=0.61, 10=0.57, 100=0.437, 500=0.38, 1000=0.3135 (USD)", Radiation Hardening=No, REACH SVHC="No SVHC", Row Spacing=0.079inch, Stock 1=1827, Supplier 1=Digi-Key, Termination=Solder
CON3: library part 52018-6646, "CONN MOD JACK R/A 6P6C", Color=Grey, Flammability Rating="UL94 V-0", Manufacturer=Molex, Max Operating Temperature=80°C, Min Operating Temperature=-40°C, Package Quantity=250, Supplier Part Number 1=WM5465-ND, ComponentLink1Description=https://www.verical.com/server-webapp/html/getDatasheet?partID=791748&src-supplier=Verical, ComponentLink1URL=https://www.verical.com/server-webapp/html/getDatasheet?partID=791748&src-supplier=Verical, ComponentLink2Description=http://www.jameco.com/Jameco/Products/ProdDS/801246.pdf?src-supplier=Jameco, ComponentLink2URL=http://www.jameco.com/Jameco/Products/ProdDS/801246.pdf?src-supplier=Jameco, ComponentLink3Description=http://www.molex.com/pdm_docs/sd/520188245_sd.pdf?src-supplier=Avnet, ComponentLink3URL=http://www.molex.com/pdm_docs/sd/520188245_sd.pdf?src-supplier=Avnet, ComponentLink4Description=http://www.onlinecomponents.com/productFiles/mf-MOL/520188245_sd.pdf?src-supplier=Onlinecomponents.com, ComponentLink4URL=http://www.onlinecomponents.com/productFiles/mf-MOL/520188245_sd.pdf?src-supplier=Onlinecomponents.com, ComponentLink5Description=http://www.mouser.com/ds/2/276/520186646_sd-208425.pdf?src-supplier=Mouser, ComponentLink5URL=http://www.mouser.com/ds/2/276/520186646_sd-208425.pdf?src-supplier=Mouser, Connector Type=Socket, Contact Material=Bronze, Contact Plating=Gold, Depth=13mm, Gender=Female, Housing Color=Grey, Housing Material=Polyester, Lead Free="Lead Free", Length=12.2mm, Manufacturer Part Number=52018-6646, Mount="Through Hole", Number of Contacts=6, Number of Ports=1, Number of Positions=6, Number of Positions Loaded=6, Orientation="Right Angle", Packaging=Tray, Pitch=2.04mm, Pricing 1="1=1.43, 10=1.294, 25=1.2144, 50=1.1616, 100=1.1088, 250=1.0032, 500=0.924, 1000=0.792, 2500=0.7392 (USD)", Radiation Hardening=No, REACH SVHC=Unknown, Shielding=Unshielded, Stock 1=8764, Supplier 1=Digi-Key, Termination=SMD/SMT, Width=13mm
D1: "DIODE SWITCH 100V 0.15A SOD123", Average Rectified Current=150mA, Capacitance=4pF, Forward Voltage=1V, Manufacturer=MCC, Max Current Consumption=1uA, Max Forward Surge Current (Ifsm)=1A, Max Operating Temperature=150°C, Max Repetitive Reverse Voltage (Vrrm)=100V, Max Reverse Leakage Current=5uA, Max Surge Current=2A, Min Operating Temperature=-65°C, Package Quantity=3000, Power Dissipation=400mW, Supplier Part Number 1=1N4148WTPMSCT-ND, ComponentLink1Description=http://www.farnell.com/datasheets/1684829.pdf?src-supplier=Newark, ComponentLink1URL=http://www.farnell.com/datasheets/1684829.pdf?src-supplier=Newark, ComponentLink2Description=http://www.mccsemi.com/up_pdf/1N4148W(SOD123).pdf?src-supplier=Future+Electronics, ComponentLink2URL=http://www.mccsemi.com/up_pdf/1N4148W(SOD123).pdf?src-supplier=Future+Electronics, ComponentLink3Description=http://www.mouser.com/ds/2/258/1N4148W(SOD123)-349435.pdf?src-supplier=Mouser, ComponentLink3URL=http://www.mouser.com/ds/2/258/1N4148W(SOD123)-349435.pdf?src-supplier=Mouser, ComponentLink4Description=http://www.alliedelec.com/images/products/datasheets/bm/MCC/70055519.pdf?src-supplier=Allied+Electronics, ComponentLink4URL=http://www.alliedelec.com/images/products/datasheets/bm/MCC/70055519.pdf?src-supplier=Allied+Electronics, ComponentLink5Description=http://www.mccsemi.com/up_pdf/1N4148W(SOD123).pdf?src-supplier=Digi-Key, ComponentLink5URL=http://www.mccsemi.com/up_pdf/1N4148W(SOD123).pdf?src-supplier=Digi-Key, ComponentLink6Description=http://www.farnell.com/datasheets/1684829.pdf?src-supplier=Element14, ComponentLink6URL=http://www.farnell.com/datasheets/1684829.pdf?src-supplier=Element14, Current Rating=150mA, Element Configuration=Single, Forward Current=150mA, Height=1.2mm, Lead Free="Lead Free", Length=2.85mm, Manufacturer Part Number=1N4148W-TP, Max Reverse Voltage (DC)=100V, Mount="Surface Mount", Number of Pins=2, Output Current=150mA, Packaging="Tape and Reel", Peak Non-Repetitive Surge Current=2A, Polarity=Standard, Pricing 1="1=0.17, 10=0.158, 100=0.066, 500=0.0518, 1000=0.036 (USD)", Radiation Hardening=No, REACH SVHC=Unknown, Recovery Time=4ns, Reverse Recovery Time=4ns, Stock 1=337039, Supplier 1=Digi-Key, Voltage Rating (DC)=100V, Width=1.8mm
D2 D3: library part UCLAMP0501H.TCT, "TVS DIODE 5VWM 12.5VC SOD523", Breakdown Voltage=6V, Capacitance=160pF, Clamping Voltage=12.5V, Leakage Current=5uA, Manufacturer=Semtech, Max Operating Temperature=125°C, Max Power Dissipation=240W, Min Operating Temperature=-55°C, Peak Pulse Current=16A, Power Line Protection=No, Reverse Standoff Voltage=5V, Supplier Part Number 1=UCLAMP0501HDKR-ND, Test Current=1mA, ComponentLink1Description=http://www.semtech.com/images/datasheet/uclamp0501h.pdf?src-supplier=Future+Electronics, ComponentLink1URL=http://www.semtech.com/images/datasheet/uclamp0501h.pdf?src-supplier=Future+Electronics, ComponentLink2Description=https://www.verical.com/server-webapp/html/getDatasheet?partID=51047&src-supplier=Verical, ComponentLink2URL=https://www.verical.com/server-webapp/html/getDatasheet?partID=51047&src-supplier=Verical, ComponentLink3Description=http://www.semtech.com/images/datasheet/uclamp0501h.pdf?src-supplier=Digi-Key, ComponentLink3URL=http://www.semtech.com/images/datasheet/uclamp0501h.pdf?src-supplier=Digi-Key, ComponentLink4Description=https://www.semtech.com/uploads/documents/uclamp0501h.pdf?src-supplier=Digi-Key, ComponentLink4URL=https://www.semtech.com/uploads/documents/uclamp0501h.pdf?src-supplier=Digi-Key, ComponentLink5Description=http://www.semtech.com/images/datasheet/uclamp0501h.pdf?src-supplier=Element14, ComponentLink5URL=http://www.semtech.com/images/datasheet/uclamp0501h.pdf?src-supplier=Element14, ComponentLink6Description=http://www.farnell.com/datasheets/1796175.pdf?src-supplier=Element14, ComponentLink6URL=http://www.farnell.com/datasheets/1796175.pdf?src-supplier=Element14, ComponentLink7Description=http://www.semtech.com/images/datasheet/uclamp0501h.pdf?src-supplier=Avnet, ComponentLink7URL=http://www.semtech.com/images/datasheet/uclamp0501h.pdf?src-supplier=Avnet, Composition=Zener, Depth=0.9mm, Direction=Unidirectional, Element Configuration=Single, Lead Free="Lead Free", Length=1.3mm, Manufacturer Part Number=UCLAMP0501H.TCT, Max Breakdown Voltage=6V, Min Breakdown Voltage=6V, Mount="Surface Mount", Number of Channels=1, Number of Elements=1, Number of Pins=2, Number of Unidirectional Channels=1, Packaging="Tape and Reel", Peak Pulse Power=240W, Polarity=Unidirectional, Pricing 1="1=0.58, 10=0.51, 25=0.4788, 100=0.3909, 250=0.3631, 500=0.309, 1000=0.2472 (USD)", Radiation Hardening=No, REACH SVHC="No SVHC", Reverse Breakdown Voltage=6V, Stock 1=29145, Supplier 1=Digi-Key, Voltage Rating (DC)=5V, Width=900um, Working Voltage=5V
DS1 DS2 DS3 DS4: library part LGR971-KN-1, "LED Uni-Color Green 572nm 2-Pin SMD T/R", Case Code (Imperial)=0805, Case Code (Metric)=2012, Color=Green, Forward Current=25mA, Forward Voltage=2.2V, Lens Color=White, Manufacturer="Osram Opto", Max Operating Temperature=85°C, Min Operating Temperature=-30°C, Package Quantity=1, Power Dissipation=65mW, Reverse Voltage=12V, Supplier Part Number 1=475-1410-6-ND, Test Current=20mA, Case/Package=0805, ComponentLink1Description=https://www.verical.com/server-webapp/html/getDatasheet?partID=233880&src-supplier=Verical, ComponentLink1URL=https://www.verical.com/server-webapp/html/getDatasheet?partID=233880&src-supplier=Verical, ComponentLink2Description=https://www.verical.com/server-webapp/html/getDatasheet?partID=462214&src-supplier=Verical, ComponentLink2URL=https://www.verical.com/server-webapp/html/getDatasheet?partID=462214&src-supplier=Verical, ComponentLink3Description=https://dammedia.osram.info/media/resource/hires/osram-dam-2493936/LG%20R971.pdf?src-supplier=Digi-Key, ComponentLink3URL=https://dammedia.osram.info/media/resource/hires/osram-dam-2493936/LG%20R971.pdf?src-supplier=Digi-Key, ComponentLink4Description=http://www.mouser.com/ds/2/311/LG%20R971%20-%20CHIPLED%200805-318376.pdf?src-supplier=Mouser, ComponentLink4URL=http://www.mouser.com/ds/2/311/LG%20R971%20-%20CHIPLED%200805-318376.pdf?src-supplier=Mouser, Depth=1.35mm, Dominant Wavelength=570nm, Height=0.9mm, Illumination Color=Green, Length=2.1mm, Lens Size=1.25mm, Lens Style=Diffused,Flat,Colorless,Rectangular, Lens Transparency=Diffused, Luminous Flux=0.1lm, Luminous Intensity=45mcd, Manufacturer Part Number=LGR971-KN-1, Mount="Surface Mount", Number of Elements=1, Number of LEDs=1, Number of Pins=2, Packaging="Tape and Reel", Pricing 1="1=0.31, 10=0.229, 100=0.1083, 500=0.0722, 1000=0.0566 (USD)", Radiation Hardening=No, Stock 1=173237, Supplier 1=Digi-Key, Viewing Angle=160°, Width=1.25mm
EXP1 EXP2: library part HLW8S-2C7LF, "CONN FFC FPC VERT 8POS 1MM PCB", Contact Resistance=30mR, Current Rating=1A, Flammability Rating="UL94 V-0", Housing Color=Black, Insulation Resistance=500MR, Manufacturer="Amphenol FCI", Max Operating Temperature=85°C, Max Voltage Rating (AC)=100V, Min Operating Temperature=-55°C, Package Quantity=250, Supplier Part Number 1=609-1821-ND, ComponentLink1Description=https://cdn.amphenol-icc.com/media/wysiwyg/files/drawing/hlw01lf.pdf?src-supplier=Digi-Key, ComponentLink1URL=https://cdn.amphenol-icc.com/media/wysiwyg/files/drawing/hlw01lf.pdf?src-supplier=Digi-Key, ComponentLink2Description=http://portal.fciconnect.com/Comergent/fci/drawing/hlw01lf.pdf?src-supplier=Avnet, ComponentLink2URL=http://portal.fciconnect.com/Comergent/fci/drawing/hlw01lf.pdf?src-supplier=Avnet, Contact Location=Top, Contact Material=Bronze, Contact Plating=Tin, Depth=3.9mm, Gender=Receptacle, Housing Material=Polybutylene, Lead Free="Lead Free", Length=10.6mm, Manufacturer Part Number=HLW8S-2C7LF, Max Voltage Rating (DC)=100V, Mount="Through Hole", Number of Contacts=8, Number of Positions=8, Number of Rows=1, Orientation=Straight, Packaging=Tray, Pitch=1mm, Pricing 1="1=0.22, 10=0.204, 25=0.1744, 50=0.1526, 100=0.1417, 250=0.1254, 500=0.1199, 1000=0.0981, 2500=0.0899 (USD)", Radiation Hardening=No, REACH SVHC="No SVHC", Stock 1=4257, Supplier 1=Digi-Key, Termination=Solder, Voltage Rating=100V, Voltage Rating (AC)=100V, Width=3.9mm, Wire/Cable Type=Straight
I1: library part BLM21AG121SN1D, "FERRITE BEAD 120 OHM 0805 1LN", Case Code (Imperial)=0805, Case Code (Metric)=2012, Current Rating=800mA, DC Current=200mA, DC Resistance (DCR)=100mR, Frequency=100MHz, Manufacturer=Murata, Max Current Rating=1A, Max Operating Temperature=125°C, Min Operating Temperature=-55°C, Package Quantity=1, Resistance=150mR, Supplier Part Number 1=490-1038-1-ND, Tolerance=25%, Case/Package=0805, ComponentLink1Description=http://www.farnell.com/datasheets/1914683.pdf?src-supplier=Farnell, ComponentLink1URL=http://www.farnell.com/datasheets/1914683.pdf?src-supplier=Farnell, ComponentLink2Description=http://search.murata.co.jp/Ceramy/image/img/PDF/ENG/L0110S0100BLM21A.pdf?src-supplier=Future+Electronics, ComponentLink2URL=http://search.murata.co.jp/Ceramy/image/img/PDF/ENG/L0110S0100BLM21A.pdf?src-supplier=Future+Electronics, ComponentLink3Description=https://www.murata.com/en-us/products/productdata/8796738977822/ENFA0005.pdf?src-supplier=Avnet, ComponentLink3URL=https://www.murata.com/en-us/products/productdata/8796738977822/ENFA0005.pdf?src-supplier=Avnet, ComponentLink4Description=https://www.murata.com/en-us/products/productdata/8796738977822/ENFA0005.pdf?src-supplier=Avnet+Europe, ComponentLink4URL=https://www.murata.com/en-us/products/productdata/8796738977822/ENFA0005.pdf?src-supplier=Avnet+Europe, ComponentLink5Description=https://www.murata.com/en-us/products/productdata/8796738977822/ENFA0005.pdf?src-supplier=Digi-Key, ComponentLink5URL=https://www.murata.com/en-us/products/productdata/8796738977822/ENFA0005.pdf?src-supplier=Digi-Key, ComponentLink6Description=http://www.produktinfo.conrad.com/datenblaetter/1100000-1199999/001172324-da-01-en-DROSSEL_0805_120R_2_0X1_25MM_4000ST.pdf?src-supplier=Conrad, ComponentLink6URL=http://www.produktinfo.conrad.com/datenblaetter/1100000-1199999/001172324-da-01-en-DROSSEL_0805_120R_2_0X1_25MM_4000ST.pdf?src-supplier=Conrad, ComponentLink7Description=http://www.produktinfo.conrad.com/datenblaetter/425000-449999/442447-da-01-en-CHIP_DROSSEL_0805_120R_200MA_2_0X1_25MM.pdf?src-supplier=Conrad, ComponentLink7URL=http://www.produktinfo.conrad.com/datenblaetter/425000-449999/442447-da-01-en-CHIP_DROSSEL_0805_120R_200MA_2_0X1_25MM.pdf?src-supplier=Conrad, Core Material=Ferrite, Depth=1.25mm, Height=0.85mm, Impedance=120R, Lead Free="Lead Free", Length=2mm, Manufacturer Part Number=BLM21AG121SN1D, Material=Steel,Ferrite, Max DC Current=200mA, Military Standard=Not, Number of Circuits=1, Number of Lines=1, Number of Pins=2, Packaging="Tape and Reel", Pricing 1="1=0.15, 10=0.119, 25=0.0924, 50=0.0766, 100=0.066, 250=0.0528, 500=0.0475, 1000=0.0396 (USD)", Radiation Hardening=No, REACH SVHC="No SVHC", Shielding=Unshielded, Stock 1=40999, Supplier 1=Digi-Key, Termination=SMD/SMT, Test Frequency=100MHz, Width=1.25mm
J1: "CONN POWER JACK 2.1MM", Color=Black, Current Rating=2.5A, Flammability Rating="UL94 V-0", Insulation Resistance=50MR, Manufacturer="CUI Inc", Manufacturer Part Number=PJ-002A, Max Operating Temperature=85°C, Min Operating Temperature=-25°C, Package Quantity=500, Supplier Part Number 1=CP-002A-ND, Voltage Rating=24V, ComponentLink1Description="Manufacturer Link", ComponentLink1URL=http://domino.kycon.com/internet/Products.html, Connector Type=Jack, Contact Gender=Male, Contact Material="Copper Alloy,Copper", Contact Plating=Tin,Nickel, DatasheetDocument=09-May-2002, Diameter=2.1mm, Gender=Male, Housing Color=Black, Housing Material=Thermoplastic, Lead Free="Lead Free", Mount="Through Hole", Number of Conductors=2, Orientation=Horizontal, Packaging=Bulk, Pricing 1="1=0.6, 10=0.558, 25=0.5024, 50=0.4464, 100=0.4278, 250=0.3906, 500=0.372, 1000=0.3069, 2500=0.279 (USD)", Published=17-Dec-2003, Publisher="Altium Limited", Shielding=Unshielded, Stock 1=51043, Supplier 1=Digi-Key, Termination="Through Hole"
JP1 JP2 JP3: library part 77313-801-08LF, "Headers & Wire Housings 8P STR DR TMT HDR .38 AU .425IN LENGTH", Color=Black, Current Rating=3A, Flammability Rating="UL94 V-0", Insulation Resistance=5GR, Manufacturer="Amphenol FCI", Max Operating Temperature=125°C, Max Voltage Rating (AC)=1.5kV, Min Operating Temperature=-65°C, Package Quantity=500, Supplier Part Number 1=77313-801-08LF-ND, ComponentLink1Description=http://portal.fciconnect.com/Comergent//fci/drawing/77313.pdf?src-supplier=Digi-Key, ComponentLink1URL=http://portal.fciconnect.com/Comergent//fci/drawing/77313.pdf?src-supplier=Digi-Key, ComponentLink2Description=http://portal.fciconnect.com/Comergent/fci/drawing/77313.pdf?src-supplier=Avnet, ComponentLink2URL=http://portal.fciconnect.com/Comergent/fci/drawing/77313.pdf?src-supplier=Avnet, Connector Type="Male Pin", Contact Gender=Male, Contact Material=Bronze, Contact Mating Length=0.23inch, Contact Plating=Gold,GXT, Contact Post Length=2.41mm, Contact Type="Male Pin", Depth=4.83mm, Gender=Male, Housing Color=Black, Housing Material=Thermoplastic, Lead Free="Lead Free", Length=10.16mm, Manufacturer Part Number=77313-801-08LF, Mount="Through Hole", Number of Contacts=8, Number of Positions=8, Number of Rows=2, Orientation=Straight, Packaging=Bulk, Pitch=2.54mm, Radiation Hardening=No, Row Spacing=0.1inch, Series="BERGSTIK®, MezzSelect™, Basics+", Stock 1=0, Supplier 1=Digi-Key, Termination=Solder, Voltage Rating=1.5kV
PRG1: library part 20021311-00008T4LF, "CONN RCPT 8POS 0.05 GOLD PCB", Color=Black, Contact Resistance=30mR, Current Rating=1A, Manufacturer="Amphenol FCI", Max Operating Temperature=85°C, Max Voltage Rating (AC)=125V, Min Operating Temperature=-40°C, Package Quantity=106, Supplier Part Number 1=609-3753-ND, ComponentLink1Description=https://media.digikey.com/pdf/Data%20Sheets/FCI%20PDFs/Minitek%20127_Catalog.pdf?src-supplier=Digi-Key, ComponentLink1URL=https://media.digikey.com/pdf/Data%20Sheets/FCI%20PDFs/Minitek%20127_Catalog.pdf?src-supplier=Digi-Key, ComponentLink2Description=http://portal.fciconnect.com/Comergent/fci/drawing/20021311.pdf?src-supplier=Avnet, ComponentLink2URL=http://portal.fciconnect.com/Comergent/fci/drawing/20021311.pdf?src-supplier=Avnet, ComponentLink3Description=http://portal.fciconnect.com/Comergent/fci/drawing/20021311.pdf?src-supplier=Avnet+Europe, ComponentLink3URL=http://portal.fciconnect.com/Comergent/fci/drawing/20021311.pdf?src-supplier=Avnet+Europe, ComponentLink4Description=http://portal.fciconnect.com/Comergent//fci/drawing/20021311.pdf?src-supplier=Mouser, ComponentLink4URL=http://portal.fciconnect.com/Comergent//fci/drawing/20021311.pdf?src-supplier=Mouser, Connector Type=Receptacle,Socket, Contact Material="Copper Alloy", Contact Plating=Gold, Depth=3mm, Gender=Female, Housing Material=Plastic, Length=3.81mm, Manufacturer Part Number=20021311-00008T4LF, Mount="Through Hole", Number of Contacts=8, Number of Positions=8, Number of Rows=2, Orientation=Straight, Packaging=Rail/Tube, Pitch=1.27mm, Pricing 1="1=0.76, 10=0.711, 106=0.5449, 530=0.4738, 1060=0.3909, 5088=0.3435, 10070=0.3198 (USD)", Radiation Hardening=No, Row Spacing=0.05inch, Stack Height=4.3mm, Stock 1=15145, Supplier 1=Digi-Key, Termination=Solder, Voltage Rating=125V
R1 R2 R4 R5 R6 R8 R9: library part RC0603FR-071KL, "RES SMD 1K OHM 1% 1/10W 0603", Case Code (Imperial)=0603, Case Code (Metric)=1608, Manufacturer=Yageo, Max Operating Temperature=155°C, Min Operating Temperature=-55°C, Power Rating=100mW, Resistance=1kR, Supplier Part Number 1=311-1.00KHRDKR-ND, Temperature Coefficient=100ppm/°C, Tolerance=1%, Voltage Rating=50V, Case/Package=0603, ComponentLink1Description=http://documents.rs-components.com/techlib://itc_doclist_GB.htm?stockno=5048928&src-supplier=RSComponents, ComponentLink1URL=http://documents.rs-components.com/techlib://itc_doclist_GB.htm?stockno=5048928&src-supplier=RSComponents, ComponentLink2Description=http://www.yageo.com/documents/recent/PYu-RC0603_51_RoHS_L_4.pdf?src-supplier=Avnet+Europe, ComponentLink2URL=http://www.yageo.com/documents/recent/PYu-RC0603_51_RoHS_L_4.pdf?src-supplier=Avnet+Europe, ComponentLink3Description=http://www.farnell.com/datasheets/2167052.pdf?src-supplier=Element14, ComponentLink3URL=http://www.farnell.com/datasheets/2167052.pdf?src-supplier=Element14, ComponentLink4Description=http://www.farnell.com/datasheets/1868787.pdf?src-supplier=Element14, ComponentLink4URL=http://www.farnell.com/datasheets/1868787.pdf?src-supplier=Element14, ComponentLink5Description=http://www.yageo.com/documents/recent/PYu-RC_Group_51_RoHS_L_2.pdf?src-supplier=Avnet, ComponentLink5URL=http://www.yageo.com/documents/recent/PYu-RC_Group_51_RoHS_L_2.pdf?src-supplier=Avnet, ComponentLink6Description=https://www.verical.com/server-webapp/html/getDatasheet?partID=404327&src-supplier=Verical, ComponentLink6URL=https://www.verical.com/server-webapp/html/getDatasheet?partID=404327&src-supplier=Verical, ComponentLink7Description=http://www.farnell.com/datasheets/443971.pdf?src-supplier=Element14, ComponentLink7URL=http://www.farnell.com/datasheets/443971.pdf?src-supplier=Element14, Composition="Thick Film", Contact Plating=Tin,Matte, Depth=0.8mm, Height=0.45mm, Lead Free="Lead Free", Length=1.6mm, Manufacturer Part Number=RC0603FR-071KL, Military Standard=Not, Packaging="Tape and Reel", Pricing 1="1=0.1, 10=0.024, 100=0.0097, 1000=0.0044, 2500=0.0038 (USD)", Radiation Hardening=No, REACH SVHC="No SVHC", Stock 1=48702346, Supplier 1=Digi-Key, Termination=SMD/SMT
R3: library part RMCF0603FT390R, "Res Thick Film 0603 390 Ohm 1% 0.1W ±100ppm/°C Molded SMD Paper T/R", Case Code (Imperial)=0603, Case Code (Metric)=1608, Manufacturer="Stackpole Electronics", Max Operating Temperature=155°C, Max Power Dissipation=100mW, Min Operating Temperature=-55°C, Resistance=390R, Supplier Part Number 1=RMCF0603FT390RDKR-ND, Temperature Coefficient=100ppm/°C, Tolerance=1%, Case/Package=0603, Composition="Thick Film", Contact Plating=Tin,Matte, Features="Automotive AEC-Q200", Height=0.022inch, Length=0.061inch, Manufacturer Part Number=RMCF0603FT390R, Mount="Surface Mount", Number of Terminations=2, Packaging="Tape and Reel", Pricing 1="1=0.1, 10=0.017, 100=0.0068, 1000=0.0031, 2500=0.0027 (USD)", Radiation Hardening=No, Stock 1=0, Supplier 1=Digi-Key, Width=0.031inch
R7: library part CRCW06031K20FKEA, "RES SMD 1.2K OHM 1% 1/10W 0603", Case Code (Imperial)=0603, Case Code (Metric)=1608, Manufacturer=Vishay, Max Operating Temperature=155°C, Max Power Dissipation=100mW, Min Operating Temperature=-55°C, Package Quantity=10, Resistance=1.2kR, Supplier Part Number 1=541-1.20KHCT-ND, Temperature Coefficient=100ppm/°C, Tolerance=1%, Voltage Rating=75V, Case/Package=0603, ComponentLink1Description=http://www.vishay.com/docs/20035/dcrcwe3.pdf?src-supplier=Digi-Key, ComponentLink1URL=http://www.vishay.com/docs/20035/dcrcwe3.pdf?src-supplier=Digi-Key, ComponentLink2Description=http://uk.rs-online.com/webdocs/0d98/0900766b80d98afc.pdf?src-supplier=RSComponents, ComponentLink2URL=http://uk.rs-online.com/webdocs/0d98/0900766b80d98afc.pdf?src-supplier=RSComponents, ComponentLink3Description=https://www.alliedelec.com/m/d/0c934d6939ccefa68dbe0b96d821c8cf.pdf?src-supplier=Allied+Electronics, ComponentLink3URL=https://www.alliedelec.com/m/d/0c934d6939ccefa68dbe0b96d821c8cf.pdf?src-supplier=Allied+Electronics, ComponentLink4Description=http://www.alliedelec.com/m/d/0c934d6939ccefa68dbe0b96d821c8cf.pdf?src-supplier=Allied+Electronics, ComponentLink4URL=http://www.alliedelec.com/m/d/0c934d6939ccefa68dbe0b96d821c8cf.pdf?src-supplier=Allied+Electronics, ComponentLink5Description=https://www.distrelec.biz/Web/Downloads/a_/en/flD-CRCW-e3_data_en.pdf?mime=application%2Fpdf&src-supplier=Distrelec, ComponentLink5URL=https://www.distrelec.biz/Web/Downloads/a_/en/flD-CRCW-e3_data_en.pdf?mime=application%2Fpdf&src-supplier=Distrelec, ComponentLink6Description=http://www.farnell.com/datasheets/2045673.pdf?src-supplier=Element14, ComponentLink6URL=http://www.farnell.com/datasheets/2045673.pdf?src-supplier=Element14, ComponentLink7Description=http://www.mouser.com/ds/2/427/dcrcwe3-109170.pdf?src-supplier=Mouser, ComponentLink7URL=http://www.mouser.com/ds/2/427/dcrcwe3-109170.pdf?src-supplier=Mouser, ComponentLink8Description=http://www.farnell.com/datasheets/2111203.pdf?src-supplier=Element14, ComponentLink8URL=http://www.farnell.com/datasheets/2111203.pdf?src-supplier=Element14, Composition="Thick Film", Contact Plating=Tin, Depth=0.85mm, Features="Automotive AEC-Q200", Height=0.45mm, Lead Free="Lead Free", Length=1.55mm, Manufacturer Part Number=CRCW06031K20FKEA, Military Standard=Not, Mount="Surface Mount", Number of Terminations=2, Packaging="Tape and Reel", Power Rating=100mW, Pricing 1="1=0.1, 10=0.036, 100=0.0146, 1000=0.0065, 2500=0.0057 (USD)", Radiation Hardening=No, REACH SVHC=Unknown, Stock 1=93302, Supplier 1=Digi-Key, Termination=SMD/SMT, Voltage Rating (DC)=75V, Weight=7.1E-05oz, Width=0.033inch
RSENSE1 RSENSE2: library part CRA2512-FZ-R015ELF, "Res 2512 0.015 Ohm 1% 3W 75ppm/C Molded SMD SMD T/R", Case Code (Imperial)=2512, Case Code (Metric)=6432, Manufacturer=Bourns, Max Operating Temperature=170°C, Max Power Dissipation=3W, Min Operating Temperature=-55°C, Package Quantity=1, Resistance=15mR, Supplier Part Number 1=CRA2512-FZ-R015ELFDKR-ND, Temperature Coefficient=75ppm/°C, Tolerance=1%, Case/Package=2512, ComponentLink1Description=http://www.bourns.com/docs/Product-Datasheets/CRA.pdf?src-supplier=Digi-Key, ComponentLink1URL=http://www.bourns.com/docs/Product-Datasheets/CRA.pdf?src-supplier=Digi-Key, ComponentLink2Description=https://www.bourns.com/docs/Product-Datasheets/CRA.pdf?src-supplier=Digi-Key, ComponentLink2URL=https://www.bourns.com/docs/Product-Datasheets/CRA.pdf?src-supplier=Digi-Key, ComponentLink3Description=http://uk.rs-online.com/webdocs/0ddc/0900766b80ddce06.pdf?src-supplier=RSComponents, ComponentLink3URL=http://uk.rs-online.com/webdocs/0ddc/0900766b80ddce06.pdf?src-supplier=RSComponents, ComponentLink4Description=http://www.produktinfo.conrad.com/datenblaetter/1000000-1099999/001055548-da-01-en-WID_CRA2512_FZ_R015ELF__0_015_OHM_3W_1_.pdf?src-supplier=Conrad, ComponentLink4URL=http://www.produktinfo.conrad.com/datenblaetter/1000000-1099999/001055548-da-01-en-WID_CRA2512_FZ_R015ELF__0_015_OHM_3W_1_.pdf?src-supplier=Conrad, Composition="Metal Film,Thick Film", Depth=3.2mm, Features="Moisture Resistant", Height=0.035inch, Lead Free="Lead Free", Length=0.254inch, Manufacturer Part Number=CRA2512-FZ-R015ELF, Military Standard=Not, Mount="Surface Mount", Number of Terminations=2, Packaging="Tape and Reel", Power Rating=3W, Pricing 1="1=0.69, 10=0.578, 25=0.4956, 50=0.446, 100=0.3881, 250=0.3468, 500=0.2808, 1000=0.2271 (USD)", REACH SVHC="No SVHC", Stock 1=25516, Supplier 1=Digi-Key, Termination=Solder, Width=0.126inch
S1: library part UB25SKW03N-G, "SWITCH PUSHBUTTON DPDT 5A 125V", Current Rating=5A, Flammability Rating="UL94 V-0", Manufacturer="NKK Switches", Max Operating Temperature=70°C, Min Operating Temperature=-20°C, Package Quantity=1, Supplier Part Number 1=360-3471-ND, Voltage Rating (AC)=125V, Voltage Rating (DC)=30V, Actuator Type="Square, Button", ComponentLink1Description=http://www.nkkswitches.com/pdf/ubnonilluminated.pdf?src-supplier=Digi-Key, ComponentLink1URL=http://www.nkkswitches.com/pdf/ubnonilluminated.pdf?src-supplier=Digi-Key, ComponentLink2Description=http://www.nkkswitches.com/pdf/ubilluminated.pdf?src-supplier=Future+Electronics, ComponentLink2URL=http://www.nkkswitches.com/pdf/ubilluminated.pdf?src-supplier=Future+Electronics, Contact Plating=Silver, Electrical Life=10000Cycles, Lead Free="Lead Free", Manufacturer Part Number=UB25SKW03N-G, Mechanical Life=1000000Cycles, Mount="Through Hole", Orientation=Vertical, Packaging=Bulk, Pricing 1="1=7.79, 10=7.22, 25=7.03, 50=6.84, 100=6.46, 250=6.27, 500=5.89, 1000=5.32 (USD)", Stock 1=41, Supplier 1=Digi-Key, Switch Function=On-Mom, Termination="PC Pin", Throw Configuration=DPDT